# Altium PCB 充放一体模块.pcbdoc
Units mil, origin at the board's own origin, x right, y up, seen from the top; angles counter-clockwise.
Board outline 1335 x 1610 mil, 2 copper layers (Top Layer, Bottom Layer); 26 components, 13 nets, 49 pads, 15 vias.
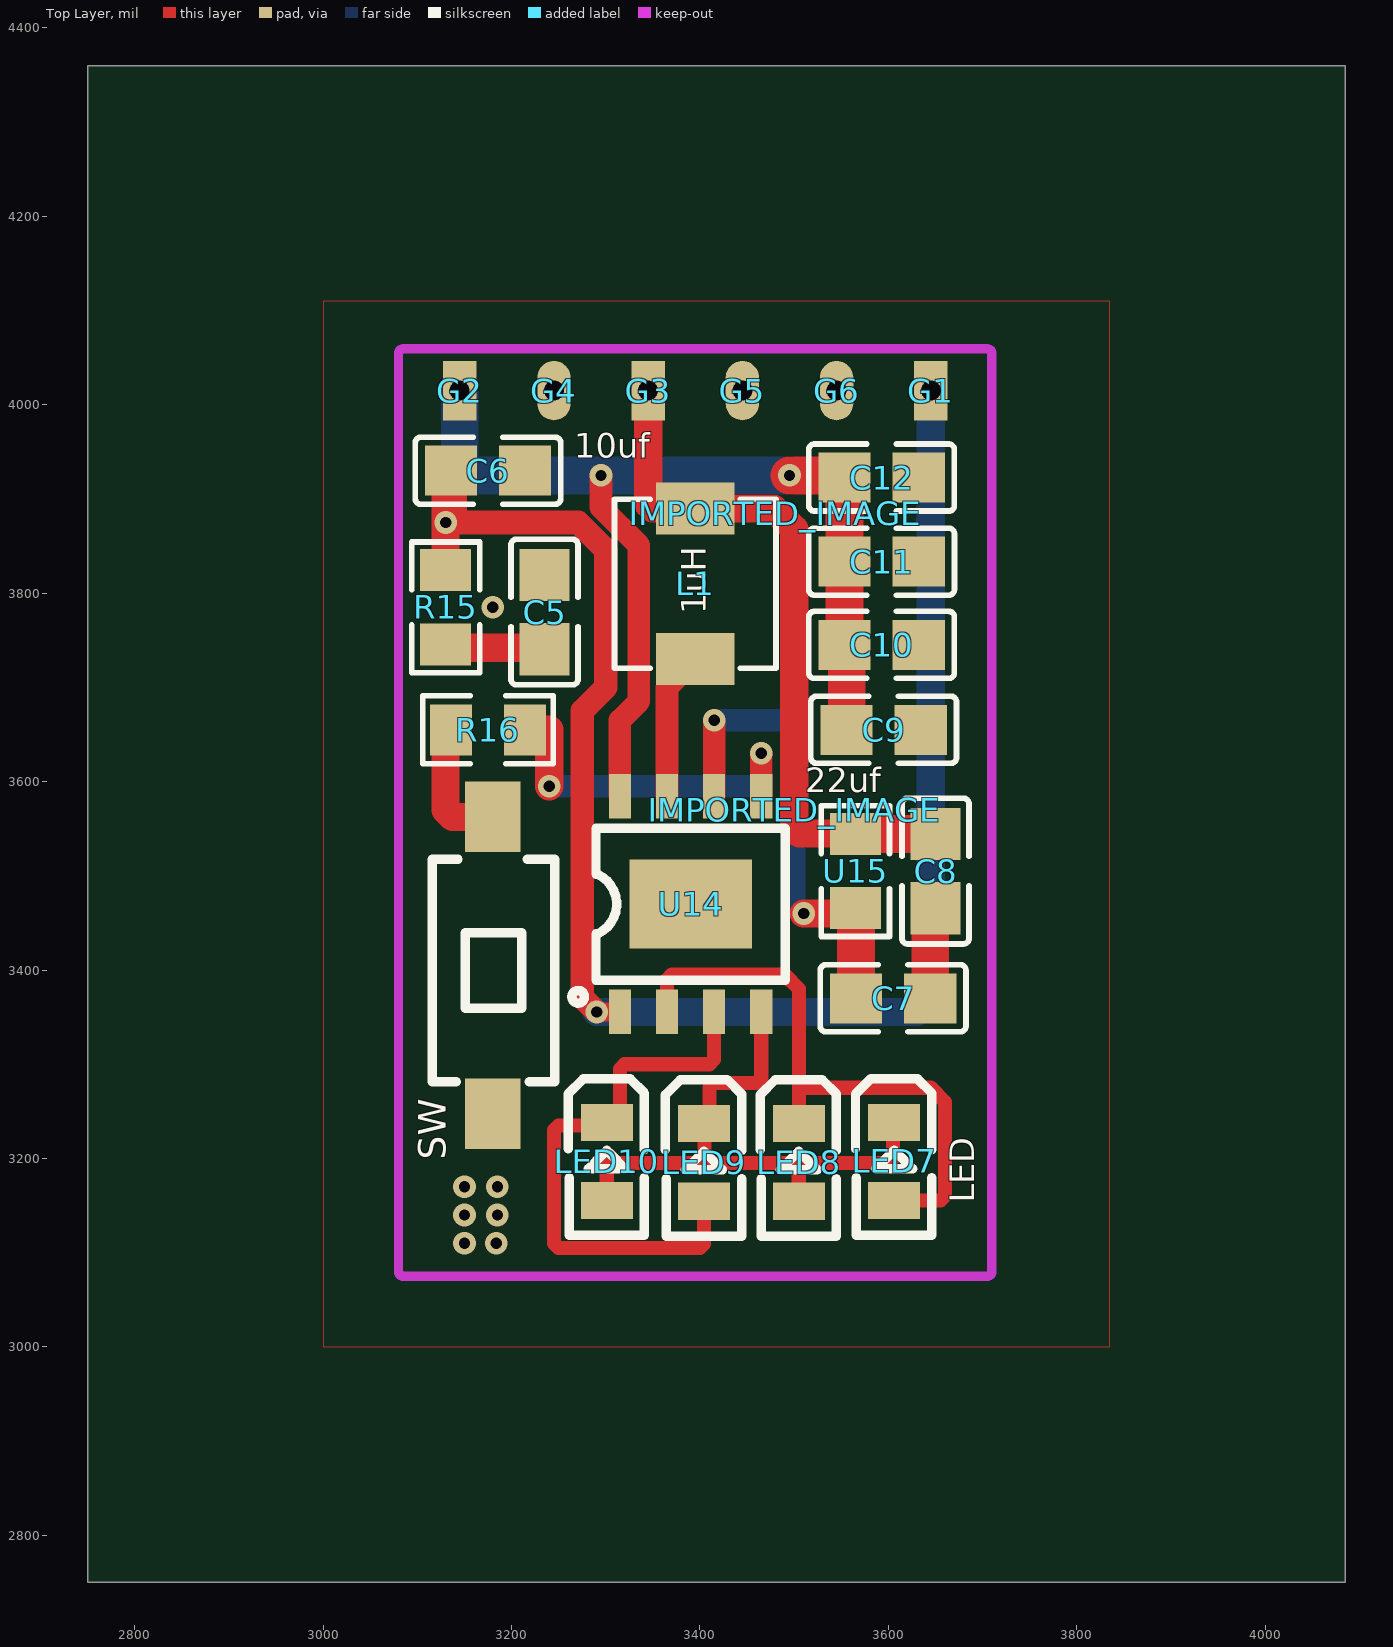
[diagram p0: Top Layer view]
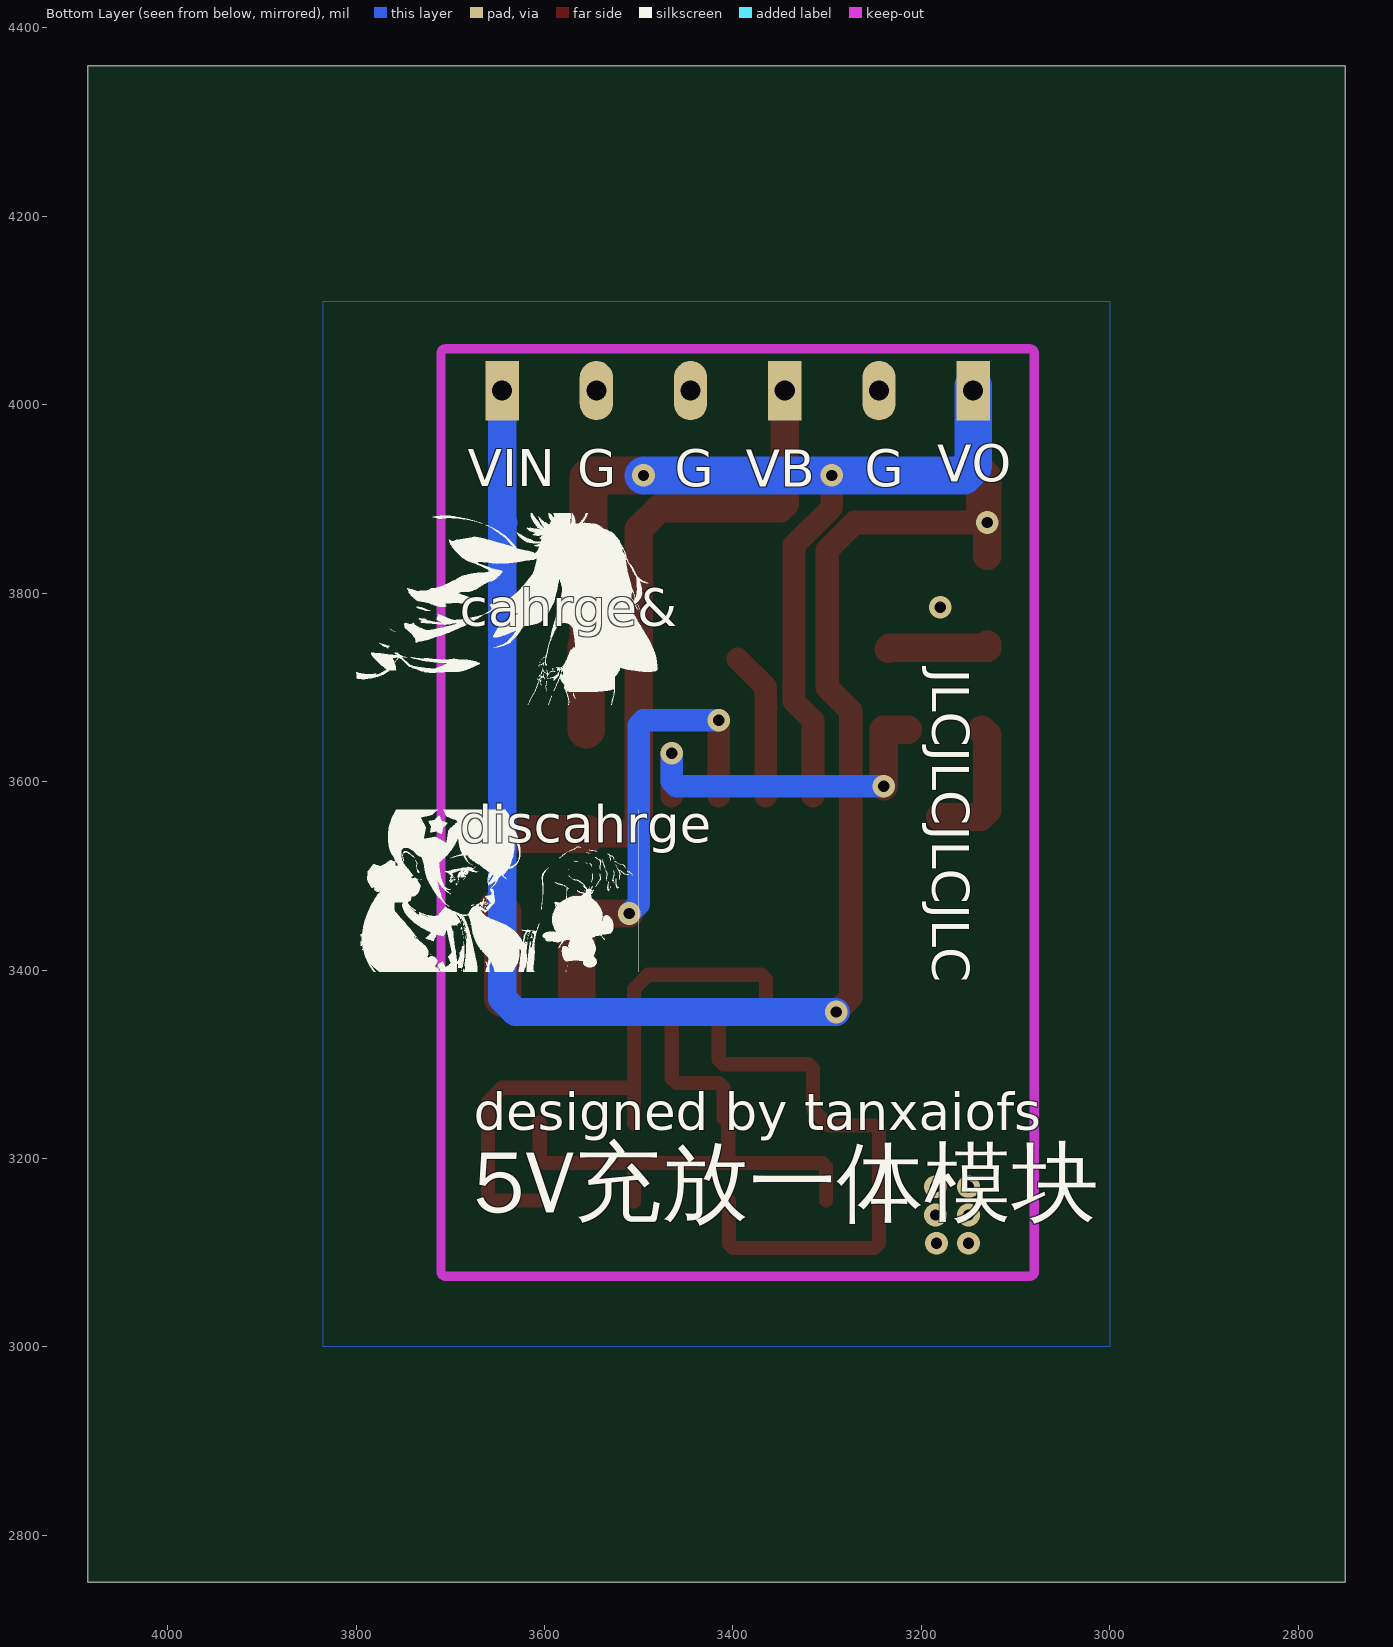
[diagram p1: Bottom Layer view, seen from below]

## Layer stack, top to bottom
Top Layer: signal copper (thickness not stored)
Dielectric: dielectric 12.6, FR-4, Dk 4.8
Bottom Layer: signal copper (thickness not stored)

## Board outline
4085,2750 2750,2750 2750,4360 4085,4360

## Components (designator, comment, footprint, x,y, rotation, side; value= is the part's Value field where it differs from the comment)
C5 "GRM21BR61H106KE43L" C0805 3235,3780 r90 top
C6 "GRM21BR61H106KE43L" C0805 3175,3930 r180 top
C7 "CL21A226MAYNNNE" C0805 3605,3370 r180 top
C8 "CL21A226MAYNNNE" C0805 3650,3505 r90 top
C9 "CL21A226MAYNNNE" C0805 3595,3655 r180 top
C10 "CL21A226MAYNNNE" C0805 3592.77,3745.1 r180 top
C11 "CL21A226MAYNNNE" C0805 3592.78,3833.49 r0 top
C12 "CL21A226MAYNNNE" C0805 3592.77,3922.73 r180 top
G1 "封闭邮票焊盘" 1p 3645,4015 r0 top
G2 "封闭邮票焊盘" 1p 3145,4015 r0 top
G3 "封闭邮票焊盘" 1p 3345,4015 r0 top
G4 "封闭邮票焊盘" 1P 3245,4015 r0 top
G5 "封闭邮票焊盘" 1P 3445,4015 r0 top
G6 "封闭邮票焊盘" 1P 3545,4015 r0 top
IMPORTED_IMAGE "IMPORTED_IMAGE" IMPORTED_IMAGE 3480,3885 r0 top
IMPORTED_IMAGE "IMPORTED_IMAGE" IMPORTED_IMAGE 3500,3570 r0 top
L1 "FXL0420-1R0-M" IND-SMD_L4.4-W4.2 3395,3810 r270 top
LED7 "NCD0805R1" LED0805-R-RD 3606.1,3196.85 r270 top
LED8 "NCD0805R1" LED0805-R-RD 3504.91,3195.9 r270 top
LED9 "NCD0805R1" LED0805-R-RD 3404.23,3195.9 r270 top
LED10 "NCD0805R1" LED0805-R-RD 3301.1,3196.85 r270 top
R15 "0805W8F200KT5E" R0805 3130,3785 r90 top
R16 "FRC0805J103TS" R0805 3175,3655 r0 top
SW "TS-1101-C-W" SW-SMD_L6.0-W3.3-LS8.0 3180,3405 r90 top
U14 "IP5306" ESOP-8_L4.9-W3.9-P1.27-LS6.0-BL-EP 3390,3470 r0 top
U15 "FRL0805JR500TS" R0805 3565,3505 r90 top

## Footprints (in the part's own frame and the unit in brackets; to place one, negate y for a bottom-side part, rotate by r counter-clockwise, add the part's x,y. Pads: shape width x height; smd on the part's side, far side on the other; paste and mask are expansions set on the pad)
1p [mm]
  rect 0.9x1.6 hole 0.54: 1(0,0)
1P [mm]
  oval 0.9x1.6 hole 0.54: 1(0,0)
C0805 [mm]
  rect 1.41x1.35 smd: 1(-1,0) 2(1,0)
  silkscreen extent -1.96,-0.9 1.96,0.9
ESOP-8_L4.9-W3.9-P1.27-LS6.0-BL-EP [mm]
  rect 0.6x1.2 smd: 1(-1.905,-2.908) 2(-0.635,-2.908) 3(0.635,-2.908) 4(1.905,-2.908) 5(1.905,2.908) 6(0.635,2.908) 7(-0.635,2.908) 8(-1.905,2.908)
  rect 3.3x2.4 smd: 9(0,0)
  silkscreen extent -3.2,-2.67 2.55,2.05
IMPORTED_IMAGE [mil]
IND-SMD_L4.4-W4.2 [mm]
  rect 1.4x2.12 smd: 1(2.028,0) 2(-2.028,0)
  silkscreen extent -2.28,-2.18 2.28,2.18
LED0805-R-RD [mm]
  rect 1x1.4 smd: 1(1.05,0) 2(-1.05,0)
  silkscreen extent -2.22,-1.04 1.99,1.01
R0805 [mm]
  rect 1.133x1.377 smd: 1(-1,0) 2(1,0)
  silkscreen extent -1.76,-0.92 1.76,0.92
SW-SMD_L6.0-W3.3-LS8.0 [mm]
  rect 1.9x1.5 smd: 1(-4,0) 2(4,0)
  silkscreen extent -3.14,-1.67 2.86,1.63

## Via types
v1: diameter 24.02, hole 12.01, Top Layer to Bottom Layer, 15 vias

## Nets (pads, with @x,y where several pads share a name; then routed paths per layer and width w, separated by ;. In a path a pad name is that pad's centre, name@x,y a point inside that pad or via, vN(x,y) a via of type N, cw(c..) or ccw(c..) an arc to the next point about the centre after c; other vN are vias at no path point)
$1N952: C5.1 R15.1 | length 109.1
  Top Layer w30: R15.1 3130,3742.11 3233.52,3742.11 C5.1
$1N953: C6.2 G1.1 R15.2 U14.1 | length 1849
  Top Layer w20: v1(3290.5,3355.5) U14.1
  Top Layer w25: C6.2@3140,3915 3140,3875 3270.75,3875 3300,3845.75 3300,3700 3275,3675 3275,3371 v1(3290.5,3355.5)
  Top Layer w30: R15.2@3130,3839.37 v1(3130,3875) 3130,3924.37 C6.2
  Bottom Layer w30: v1(3290.5,3355.5) 3630.5,3355.5 3645,3370 3645,3873.64 ; 3643.64,3875 3645,3873.64 ; G1.1@3645,4020 3645,3873.64
$1N959: R16.2 U14.5 | length 388.2
  Top Layer w24: U14.5 v1(3465,3630)
  Top Layer w30: R16.2 3240,3655 v1(3240,3595)
  Bottom Layer w24: v1(3240,3595) 3460,3595 3465,3600 v1(3465,3630)
$1N960: R16.1 SW.2 | length 140.4
  Top Layer w30: R16.1 3130,3649.37 3130,3570 3137.52,3562.48 SW.2
$1N966: C8.2 G3.1 L1.2 U15.2 | length 761.5
  Top Layer w30: G3.1@3345,4020 3345,3895 3350,3890 3394.84,3890 L1.2 3478.12,3889.84 3500,3867.96 3500,3550 3505,3545 3554.37,3545 U15.2@3555,3544.37
  Top Layer w40: U15.2@3555,3544.37 C8.2
$1N968: L1.1 U14.7 | length 158.1
  Top Layer w24: U14.7 3365,3700.16 L1.1
$1N969: C7.2 U14.6 U15.1 | length 514
  Top Layer w24: U14.6 v1(3415,3665)
  Top Layer w30: v1(3510,3460) 3559.37,3460 U15.1
  Top Layer w40: C7.2 U15.1@3565.63,3455
  Bottom Layer w24: v1(3415,3665) 3495,3665 3500,3660 3500,3470 v1(3510,3460)
$1N970: C9.2 C10.2 C11.1 C12.2 G2.1 U14.8 | length 1132.6
  Top Layer w24: v1(3295,3925) 3295,3891.06 3335.19,3850.87 3335.19,3685.19 3315,3665 U14.8
  Top Layer w40: v1(3495,3925) 3551.13,3925 C12.2 ; C12.2 C11.1 C10.2 3555.63,3742.87 C9.2
  Bottom Layer w40: G2.1@3145,4020 3145,3935 3155,3925 v1(3295,3925) v1(3495,3925)
GND: C5.2 C6.1 C7.1 C8.1 C9.1 C10.1 C11.2 C12.1 G4.1 G5.1 G6.1 SW.1 U14.9 | length 98
  Top Layer w40: C7.1 3644.37,3460 C8.1
  other v1: 3150,3110 3183.89,3110 3150,3140 3185,3140 3150,3170 3185,3170 3180,3785
L1: LED7.1 LED8.2 U14.2 | length 644.6
  Top Layer w15: U14.2 3365,3390 3370,3395 3490,3395 3505,3380 3505,3270 ; LED8.2 3505,3237.34 3505,3270 ; LED7.1 3655.5,3155.5 3660,3160 3660,3260 3645,3275 3510,3275 3505,3270
L2: LED9.1 LED10.2 U14.3 | length 605.1
  Top Layer w15: LED9.1 3404.23,3109.23 3400,3105 3250,3105 3245,3110 3245,3230 3250,3235 3297.9,3235 LED10.2 3315,3252.1 3315,3295 3320,3300 3410,3300 3415,3305 U14.3
L3: LED7.2 LED8.1 LED9.2 LED10.1 U14.4 | length 638.8
  Top Layer w15: LED10.1 3301.1,3191.1 3305,3195 3400,3195 ; U14.4 3465,3285 3460,3280 3415,3280 3410,3275 3410,3243.02 LED9.2 3405,3236.48 3405,3200 3400,3195 ; LED8.1 3504.91,3190.09 3500,3195 ; LED7.2 3605,3237.1 3605,3200 3600,3195 3500,3195 ; 3400,3195 3500,3195
"": 

## Polygon pours and split planes (outlines as drawn)
GND on Top Layer (solid, remove dead copper, pour order 0): 3000,3000 3835,3000 3835,4110 3000,4110
GND on Bottom Layer (solid, remove dead copper, pour order 1): 3000,3000 3835,3000 3835,4110 3000,4110

## Keep-outs
Board Outline Layer:
  lines w10 net "": 3080,3080 ccw(c3085,3080) 3085,3075 3704.92,3075 ccw(c3704.92,3080) 3709.92,3080 3709.92,4054.25 ccw(c3704.92,4054.25) 3704.92,4059.25 3085,4059.25 ccw(c3085,4054.25) 3080,4054.25 3080,3080

## Silkscreen, mask and mechanical layers (free items; w line width, h text height)
Top Silkscreen Layer:
  text "10uf" at 3266.64,3943.88 h25.96
  text "1uH" at 3406.12,3777.78 h25.96 r90
  text "22uf" at 3511.64,3588.88 h25.96
  text "LED" at 3691.12,3152.78 h25.96 r90
Bottom Silkscreen Layer:
  text "VO" at 3183.39,3918.32 h38.94
  text "G" at 3260,3913.18 h39.22
  text "VB" at 3386.51,3912.93 h38.94
  text "G" at 3461.7,3912.79 h39.22
  text "G" at 3565,3913.18 h39.22
  text "VIN" at 3681.68,3913.32 h38.94
  text "cahrge&" at 3690,3765 h40
  text "JLCJLCJLCJLC" at 3188.32,3719.71 h38.94 r90
  text "discahrge" at 3690,3535 h40
  text "designed by tanxaiofs" at 3675,3230 h40
  text "5V充放一体模块" at 3675.92,3142.54 h67.97